# Altium PCB TO-220-3_L10.2-W4.5-P2.54-L.pcbdoc
Units mm, origin at the board's own origin, x right, y up, seen from the top; angles counter-clockwise.
Board outline 39.54 x 31 mm, 2 copper layers (Top Layer, Bottom Layer); 1 components, 0 nets, 3 pads, 0 vias.
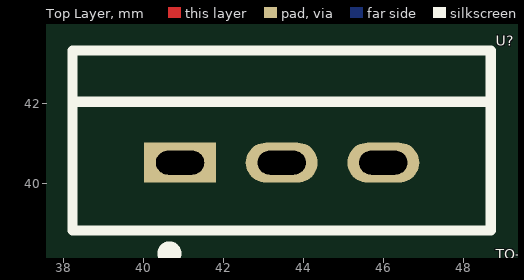
[diagram p0: Top Layer view]
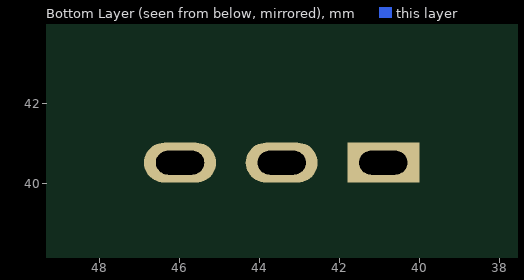
[diagram p1: Bottom Layer view, seen from below]

## Layer stack, top to bottom
Top Layer: signal copper (thickness not stored)
Dielectric: dielectric 0.32, FR-4, Dk 4.8
Bottom Layer: signal copper (thickness not stored)

## Board outline
64.937,25.4 25.4,25.4 25.4,56.4 64.937,56.4

## Components (designator, comment, footprint, x,y, rotation, side; value= is the part's Value field where it differs from the comment)
U? "TO-220-3_L10.2-W4.5-P2.54-L" TO-220-3_L10.2-W4.5-P2.54-L 43.454,40.773 r0 top

## Footprints (in the part's own frame and the unit in brackets; to place one, negate y for a bottom-side part, rotate by r counter-clockwise, add the part's x,y. Pads: shape width x height; smd on the part's side, far side on the other; paste and mask are expansions set on the pad)
TO-220-3_L10.2-W4.5-P2.54-L [mm]
  rect 1.8x1 hole 0.6 slot 1.2 at 0 deg paste+0 mask+0.051: 1(-2.54,-0.254)
  oval 1.8x1 hole 0.6 slot 1.2 at 0 deg paste+0 mask+0.051: 2(0,-0.254) 3(2.54,-0.254)
  silkscreen extent -5.23,-2.67 5.23,2.55

## Nets (pads, with @x,y where several pads share a name; then routed paths per layer and width w, separated by ;. In a path a pad name is that pad's centre, name@x,y a point inside that pad or via, vN(x,y) a via of type N, cw(c..) or ccw(c..) an arc to the next point about the centre after c; other vN are vias at no path point)
pads on no net: U?.1 U?.2 U?.3